# Altium PCB PCB_飞达电路V2.9_2021-11-06.pcbdoc
Units mm, origin at the board's own origin, x right, y up, seen from the top; angles counter-clockwise.
Board outline 196.74 x 120.55 mm, 2 copper layers (Top Layer, Bottom Layer); 54 components, 69 nets, 222 pads, 195 vias.
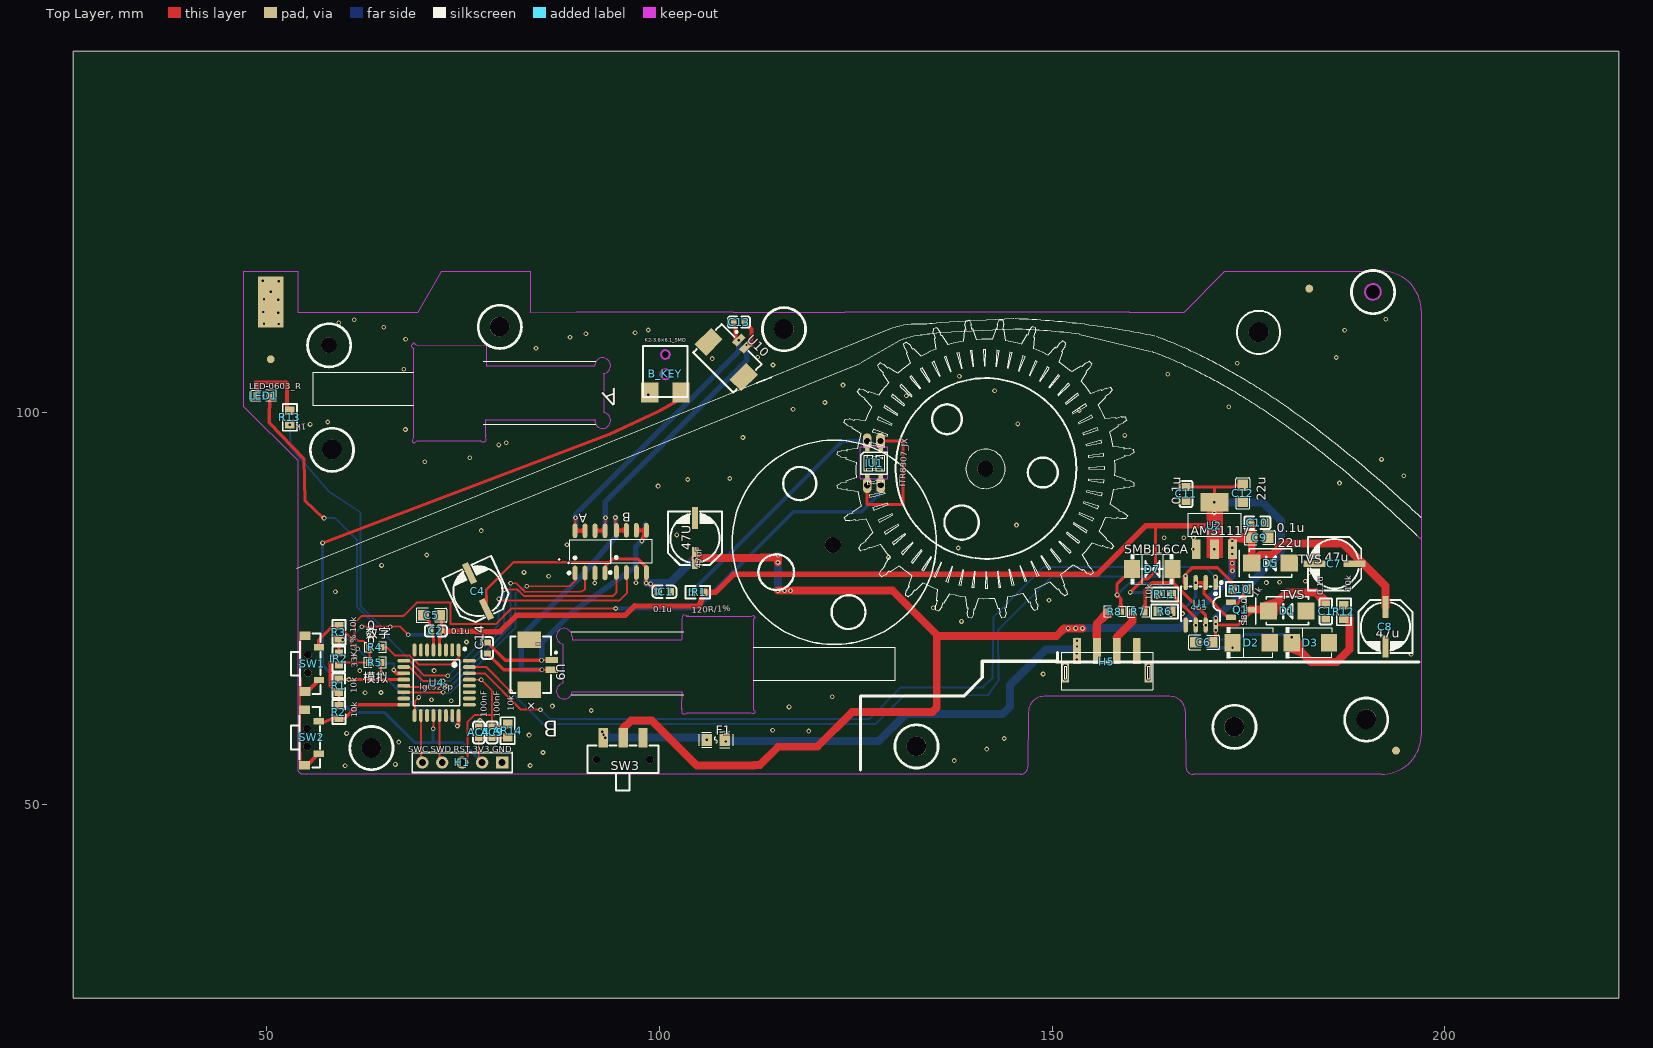
[diagram p0: Top Layer view]
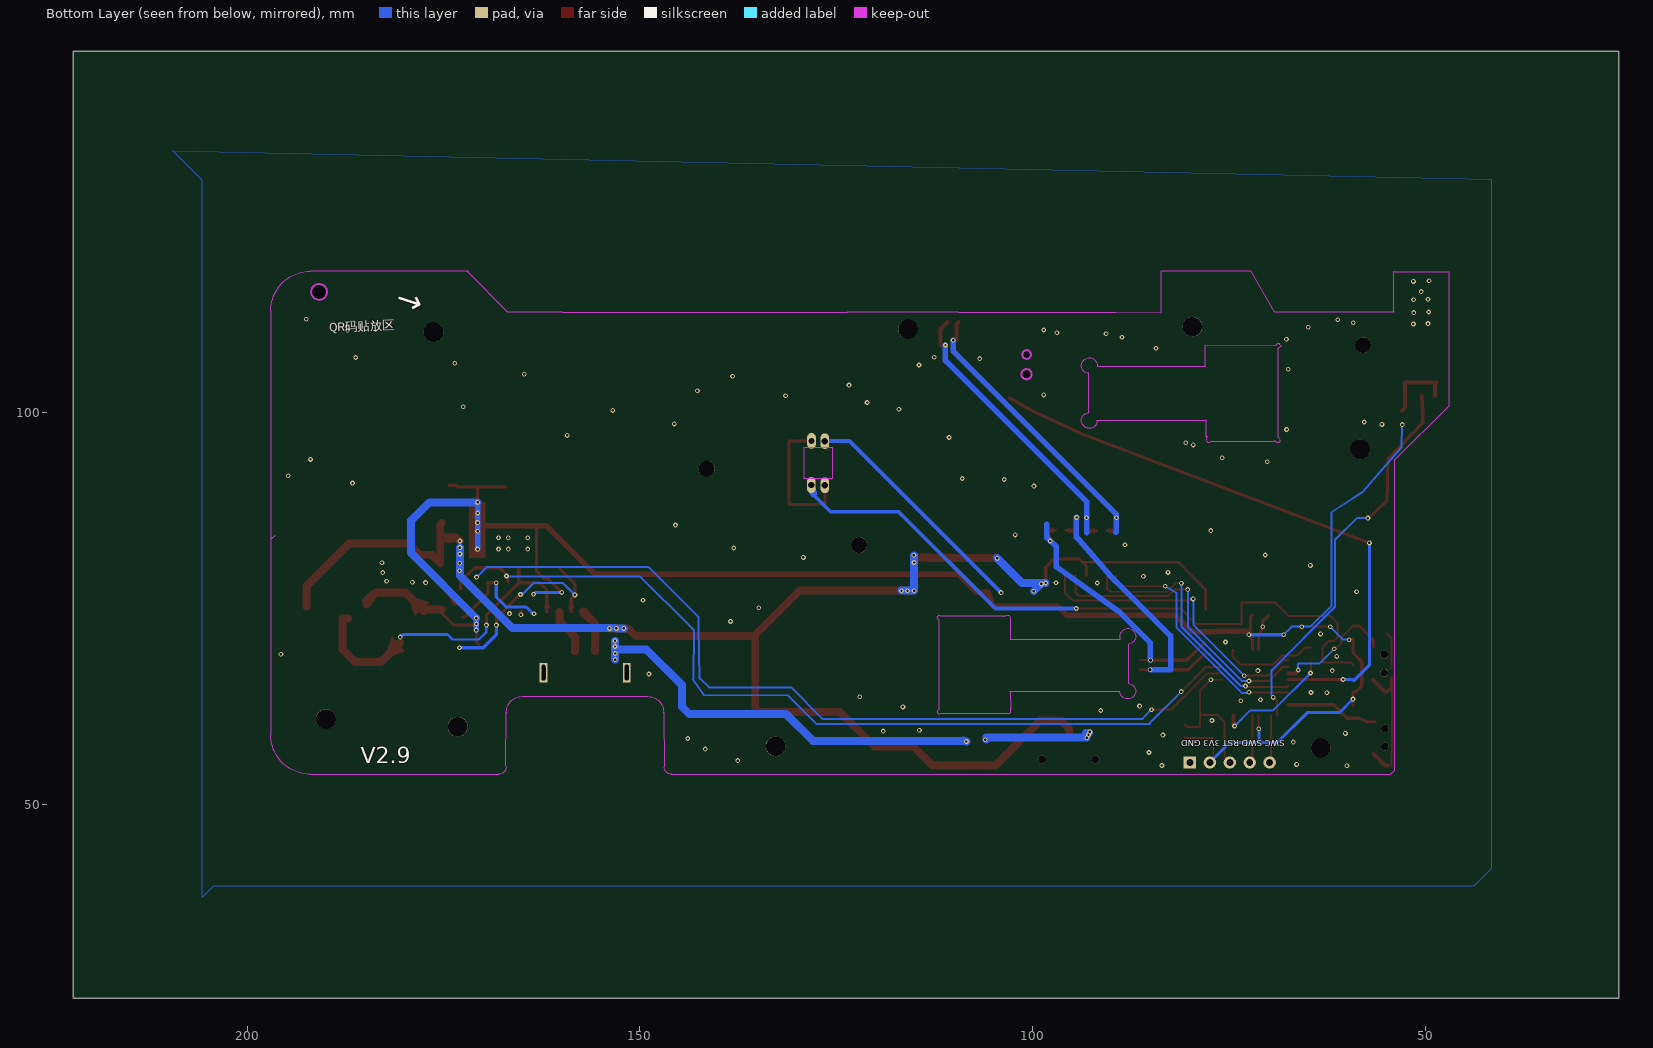
[diagram p1: Bottom Layer view, seen from below]

## Layer stack, top to bottom
Top Layer: signal copper (thickness not stored)
Dielectric: dielectric 0.32, FR-4, Dk 4.8
Bottom Layer: signal copper (thickness not stored)

## Board outline
222.142,25.4 25.4,25.4 25.4,145.948 222.142,145.948

## Components (designator, comment, footprint, x,y, rotation, side; value= is the part's Value field where it differs from the comment)
47U "47uF" CAP-D6.3-H5.5 104.547,86.511 r270 top
A "SOP-8_L4.9-W3.9-P1.27-LS6.0-BL" SOP-8_L4.9-W3.9-P1.27-LS6.0-BL 91.182,82.218 r0 top
AC4 "100nF" C0603#1 77.024,59.24 r90 top
AC9 "100nF" C0603#1 78.726,59.24 r270 top
AR14 "10k" R0603#1 80.697,59.457 r270 top
B "SOP-8_L4.9-W3.9-P1.27-LS6.0-BL" SOP-8_L4.9-W3.9-P1.27-LS6.0-BL 96.447,82.272 r0 top
B_KEY "K2-3.6×6.1_SMD" B_KEY 100.785,103.899 r0 top
C1 "0.1u" C0603#2 184.845,74.64 r270 top
C2 "0.1u" C0603#1 71.569,72.147 r0 top
C4 "47uF" CAP-D6.3-H5.5 75.846,79.518 r295 top
C5 "22u" C0805 71.013,74.145 r180 top
C6 "22u" C0805 169.316,70.689 r180 top
C7 "47u" CAP-D6.3-H5.5 183.387,80.706 r0 top
C8 "47u" CAP-D6.3-H5.5 192.432,70.149 r90 top
C9 "22u" C0805 176.448,84 r180 top
C10 "0.1u" C0603#2 176.124,85.917 r180 top
C11 "0.1u" C0603#2 167.052,89.589 r270 top
C12 "22u" C0805 174.288,89.67 r270 top
C13 "0.1u" C0603#1 110.163,111.459 r0 top
C14 "0.1u" C0603#1 78.114,69.987 r90 top
D1 "TVS" SMBJ5.0A 182.334,74.712 r180 top
D2 "SMBJ8.0A_C224028" SMB_L4.6-W3.6-LS5.3-RD 175.352,70.662 r0 top
D3 "SMBJ8.0A_C224028" SMB_L4.6-W3.6-LS5.3-RD 182.874,70.662 r0 top
D5 "TVS" SMBJ5.0A 180.201,80.787 r180 top
D7 "SMBJ16CA" SMB_L4.6-W3.6-LS5.3-BI 162.759,80.031 r180 top
F1 "F0805" F0805 107.193,58.269 r0 top
H1 "HDR-F-2.54_1x5" HDR-F-2.54_1X5 74.919,55.407 r180 top
H5 "HDR-F-2.54_1x4" 弹簧端子 156.972,67.059 r0 top
IC1 "0.1u" 0603_C_JX 100.659,77.142 r180 top
IR1 "120R/1%" 0603_R_JX 104.898,77.061 r0 top
IR2 "33K/1%" 0603_R_JX 59.232,68.582 r270 top
IU1 "ITR8307_JX" ITR8307_JX 127.339,93.51 r90 top
LED1 "LED-0603_R" LED0603_RED 49.629,102.09 r180 top
Q1 "S8550" SOT-23-3_L2.9-W1.6-P1.90-LS2.8-TR-CW 174.009,74.874 r180 top
R1 "10k" R0603#2 59.205,65.181 r270 top
R2 "10k" R0603#2 59.232,61.833 r90 top
R3 "10k" R0603#2 59.232,71.985 r270 top
R4 "0" R0603#3 63.876,70.068 r0 top
R5 "0" R0603#3 63.852,68.124 r0 top
R6 "4.7k" R0603#1 164.325,74.631 r180 top
R7 "20" R0603#3 160.979,74.577 r180 top
R8 "20" R0603#3 157.982,74.604 r180 top
R10 "1k" R0603#1 173.847,77.466 r0 top
R11 "10k" R0603#1 164.357,76.791 r0 top
R12 "10k" R0603#1 187.14,74.577 r90 top
R13 "1k" R0603#1 52.977,99.336 r270 top
SW1 "TSA365G00D-250" SW-SMD_TSA365G00D-250 55.803,67.986 r90 top
SW2 "TSA365G00D-250" SW-SMD_TSA365G00D-250 55.749,58.59 r90 top
SW3 "SSSS211603" SW-SMD_SSSS211603 95.394,58.539 r180 top
U1 "485" SOIC-8_L5.0-W4.0-P1.27-LS6.0-BL 168.906,75.603 r180 top
U2 "AMS1117" SOT-223-3_L6.5-W3.4-P2.30-LS7.0-BR 170.67,85.539 r270 top
U4 "lgt328p" LQFP-32_L7.0-W7.0-P0.80-LS9.0-BL 71.652,65.559 r180 top
U9 "CONN-SMD_WAFER-125W-2P" CONN-SMD_WAFER-125W-2P 84.891,67.827 r270 top
U10 "CONN-SMD_WAFER-125W-2P" CONN-SMD_WAFER-125W-2P 109.542,107.733 r315 top

## Footprints (in the part's own frame and the unit in brackets; to place one, negate y for a bottom-side part, rotate by r counter-clockwise, add the part's x,y. Pads: shape width x height; smd on the part's side, far side on the other; paste and mask are expansions set on the pad)
0603_C_JX [mm]
  rect 0.93x0.98 smd: 1(-0.77,-0.005) 2(0.772,0)
  silkscreen extent -1.55,-0.79 1.55,0.79
0603_R_JX [mm]
  rect 0.93x0.98 smd: 1(-0.77,-0.003) 2(0.772,-0.003)
  silkscreen extent -1.56,-0.8 1.57,0.8
B_KEY [mm]
  rect 2.2x2.5 smd: 1(-1.981,-1.397) 2(1.981,-1.397)
  round 1.3 hole 1.3 unplated: ""(0,0.889)
  round 1.1 hole 1.1 unplated: ""(0,3.429)
  silkscreen extent -2.87,-1.98 2.82,4.55
C0603#1 [mm]
  rect 0.8x0.9 smd: 1(-0.7,0) 2(0.7,0)
  silkscreen extent -1.41,-0.71 1.39,0.72
C0603#2 [mm]
  rect 1x1.1 smd: 1(-0.9,0) 2(0.9,0)
  silkscreen extent -1.65,-0.8 1.65,0.8
C0805 [mm]
  rect 1.41x1.35 smd: 1(-1.03,0) 2(1.03,0)
  silkscreen extent -1.96,-0.9 1.96,0.9
CAP-D6.3-H5.5 [mm]
  rect 2.8x0.8 smd: 1(5.08,0) 2(0,0)
  silkscreen extent -0.83,-3.43 5.97,3.43
CONN-SMD_WAFER-125W-2P [mm]
  rect 0.8x1.6 smd: 1(-0.625,1.45) 2(0.625,1.45)
  rect 2.1x3 smd: 3(3.175,-1.45) 4(-3.175,-1.45)
  silkscreen extent -3.6,-3.8 3.6,2.08
F0805 [mm]
  rect 1.335x1.5 smd: 1(-1.142,0) 2(1.142,0)
  silkscreen extent -2.16,-1.02 2.16,1.02
HDR-F-2.54_1X5 [mil]
  rect 62x62 hole 35: 1(-200,0)
  round 62 hole 35: 2(-100,0) 3(0,0) 4(100,0) 5(200,0)
  silkscreen extent -250,-50 250,50
ITR8307_JX [mm]
  rect 1.2x0.6 smd: 1(-2.1,0.85) 2(2.1,0.85) 3(-2.1,-0.85) 4(2.1,-0.85)
  silkscreen extent -1.4,-1.7 1.4,1.7
LED0603_RED [mm]
  rect 0.9x1 smd: 1(-0.85,0) 2(0.85,0)
  silkscreen extent -1.54,-0.73 1.75,0.73
LQFP-32_L7.0-W7.0-P0.80-LS9.0-BL [mm]
  oval 0.48x1.65 smd: 1(-2.799,-4.176) 2(-1.999,-4.176) 3(-1.199,-4.176) 4(-0.399,-4.176) 5(0.399,-4.176) 6(1.199,-4.176) 7(1.999,-4.176) 8(2.799,-4.176) 17(2.799,4.176) 18(1.999,4.176) 19(1.199,4.176) 20(0.399,4.176) 21(-0.399,4.176) 22(-1.199,4.176) 23(-1.999,4.176) 24(-2.799,4.176)
  oval 1.65x0.48 smd: 9(4.176,-2.799) 10(4.176,-1.999) 11(4.176,-1.199) 12(4.176,-0.399) 13(4.176,0.399) 14(4.176,1.199) 15(4.176,1.999) 16(4.176,2.799) 25(-4.176,2.799) 26(-4.176,1.999) 27(-4.176,1.199) 28(-4.176,0.399) 29(-4.176,-0.399) 30(-4.176,-1.199) 31(-4.176,-1.999) 32(-4.176,-2.799)
  silkscreen extent -3.75,-4.45 2.95,2.95
R0603#1 [mm]
  rect 1.1x1.199 smd: 1(-0.85,0) 2(0.85,0)
  silkscreen extent -1.7,-0.9 1.7,0.9
R0603#2 [mm]
  rect 1x1.1 smd: 1(-0.8,0) 2(0.8,0)
  silkscreen extent -1.55,-0.8 1.55,0.81
R0603#3 [mm]
  rect 0.806x0.864 smd: 1(-0.753,0) 2(0.753,0)
  silkscreen extent -1.39,-0.66 1.39,0.66
SMB_L4.6-W3.6-LS5.3-BI [mm]
  rect 2.047x2.241 smd: 1(-2.591,0) 2(2.591,0)
  silkscreen extent -2.67,-1.91 2.74,1.91
SMB_L4.6-W3.6-LS5.3-RD [mm]
  rect 2.047x2.192 smd: 1(-2.361,0) 2(2.361,0)
  silkscreen extent -3.12,-1.96 2.74,1.96
SMBJ5.0A [mm]
  rect 2.2x2.15 smd: 1(0,0) 2(4.79,0)
  silkscreen extent -0.31,-1.8 6.4,1.8
SOIC-8_L5.0-W4.0-P1.27-LS6.0-BL [mil]
  oval 22.38x76.78 smd: 1(-75,-106.5) 2(-25,-106.5) 3(25,-106.5) 4(75,-106.5) 5(75,106.5) 6(25,106.5) 7(-25,106.5) 8(-75,106.5)
  silkscreen extent -110,-112 98,87
SOP-8_L4.9-W3.9-P1.27-LS6.0-BL [mm]
  oval 0.63x1.865 smd: 1(-1.905,-2.682) 2(-0.635,-2.682) 3(0.635,-2.682) 4(1.905,-2.682) 5(1.905,2.682) 6(0.635,2.682) 7(-0.635,2.682) 8(-1.905,2.682)
  silkscreen extent -2.82,-2.83 2.58,1.52
SOT-23-3_L2.9-W1.6-P1.90-LS2.8-TR-CW [mm]
  rect 1.25x0.7 smd: 1(1.25,0.95) 2(1.25,-0.95) 3(-1.25,0)
  silkscreen extent -0.65,-1.46 0.9,1.46
SOT-223-3_L6.5-W3.4-P2.30-LS7.0-BR [mm]
  rect 2.5x1.1 smd: 1(2.97,-2.3) 2(2.97,0) 3(2.97,2.3)
  rect 2.34x3.6 smd: 4(-2.97,0)
  silkscreen extent -1.57,-3.33 1.37,3.33
SW-SMD_SSSS211603 [mm]
  rect 1.2x2.5 smd: 1(-2.54,0) 2(0,0) 3(2.54,0)
  round 1 hole 1 unplated: ""(-3.401,2.75) ""(3.401,2.75)
  silkscreen extent -4.5,1 4.5,6.67
SW-SMD_TSA365G00D-250 [mm]
  rect 0.8x1.3 smd: 1(-2.075,-0.9) 2(2.075,-0.9)
  rect 1.1x1.35 smd: 3(-3.55,0.9) 4(3.55,0.9)
  round 1 hole 1 unplated: ""(-1.15,0.55) ""(1.15,0.55)
  silkscreen extent -3.85,-1.05 3.85,2.65
弹簧端子 [mm]
  rect 1x3.3 smd: 1(-3.81,2.515) 2(-1.27,2.515) 3(1.27,2.515) 4(3.81,2.515)
  rect 1x2.5 hole 0.5 slot 2 at 90 deg: 5(5.298,-0.216) 6(-5.291,-0.208)
  silkscreen extent -5.83,-2.41 5.83,2.41

## Free pads (board coordinates)
  round 1 smd: 1(50.547,106.734) 2(193.773,56.919) 3(182.73,115.725)
  rect 3.2x6.5 smd: 4(50.547,113.997)
  round 2 hole 2 unplated: ""(57.958,108.528) ""(190.836,115.307) ""(190.841,115.27) ""(190.863,115.307) ""(190.863,115.307)
  round 2.5 hole 2.5 unplated: ""(58.319,95.222) ""(58.341,95.259) ""(58.341,95.259) ""(63.341,57.259) ""(79.68,110.872) ""(115.859,110.576) ""(132.723,57.471) ""(173.189,59.959) ""(176.267,110.172) ""(176.289,110.208) ""(176.289,110.208) ""(189.969,60.881) ""(189.991,60.917) ""(189.991,60.917)
  round 1.3 hole 1.3 unplated: ""(100.788,104.838) ""(100.793,104.802) ""(100.815,104.839) ""(100.815,104.839)
  round 1.1 hole 1.1 unplated: ""(100.788,107.339) ""(100.793,107.302) ""(100.815,107.339) ""(100.815,107.339)
  round 2.05 hole 2.05 unplated: ""(122.091,83.089) ""(141.507,92.796)
  oval 1.1x2 hole 0.8: ""(126.462,90.696) ""(126.462,96.312) ""(128.163,96.339) ""(128.19,90.723)

## Via types
v1: diameter 0.61, hole 0.305, Top Layer to Bottom Layer, 193 vias
v2: diameter 0.61, hole 0.4, Top Layer to Bottom Layer, 2 vias

## Nets (pads, with @x,y where several pads share a name; then routed paths per layer and width w, separated by ;. In a path a pad name is that pad's centre, name@x,y a point inside that pad or via, vN(x,y) a via of type N, cw(c..) or ccw(c..) an arc to the next point about the centre after c; other vN are vias at no path point)
13: LED1.1 U4.17 | length 49.9
  Top Layer w0.254: U4.17 68.899,61.429 68.899,63.21 v1(69.384,63.696) v1@69.331,63.695
  Top Layer w0.4: LED1.1 50.357,100.012 50.357,98.633 54.797,94.02 54.906,88.701 v1@57.322,86.42
  Bottom Layer w0.254: v1(57.338,86.511) 58.747,86.511 61.528,83.73 61.528,75.224 69.6,67.152 69.6,63.911 v1(69.384,63.696)
485A: H5.2 R8.2 | length 5.7
  Top Layer w1: H5.2@155.703,69.573 155.703,73.078 R8.2@157.23,74.604
485B: H5.3 R7.2 | length 5.8
  Top Layer w1: H5.3@158.243,69.573 158.243,71.384 160.227,73.367 R7.2@160.227,74.576
+3.3V: AC4.1 AC9.2 AR14.2 C1.1 C2.2 C5.1 C6.1 C11.1 C12.1 D1.2 H1.2 IR1.2 IR2.1 Q1.3 R1.2 R2.2 R3.2 R11.1 R13.2 U1.8 U2.2 U2.4 U4.4 U4.20 | length 280.4
  Top Layer w0.254: v1(62.121,72.687) 67.034,72.687 v1(68.06,71.661) ; v1@71.22,59.7 71.253,59.733 U4.20 ; H1.2 77.024,55.841 77.024,58.541 80.631,58.541 AR14.2
  Top Layer w0.4: R2.2 v1(59.232,63.481) 59.232,64.353 59.206,64.381 58.899,64.381 58.124,65.153 58.124,68.249 59.229,69.354 R3.2 ; C5.1@72.043,74.145 72.269,73.918 C2.2@72.269,72.148 ; U4.4 72.051,71.041 72.051,71.224 v1(72.489,71.661) ; v1(159.951,77.061) 161.652,78.762 162.165,78.762 163.168,79.765 163.168,85.511 ; C11.1@167.052,90.489 173.181,90.489 173.392,90.7 C12.1@174.289,90.7 ; C6.1@170.491,70.446 170.811,70.766 U1.8 173.674,72.897 175.259,74.482 Q1.3@175.259,74.874 ; 170.598,90.489 170.669,90.418 v1(170.669,88.508)
  Top Layer w0.7: C2.2@72.444,72.12 76.537,72.12 ; 76.684,72.067 79.734,72.067 81.812,74.145 95.663,74.145 96.905,75.387 105.086,75.28 105.67,77.058 107.136,77.058 109.435,79.357 155.739,79.357 161.896,85.511 170.669,85.514 v1(170.669,85.938) v1(170.669,88.508) ; v1(170.669,82.57) v1@170.669,85.935
  Top Layer w1: Q1.3@175.262,74.874 177.382,74.874 D1.2 ; D1.2@177.545,74.711 179.892,77.06 183.656,77.06 184.845,75.872 C1.1
  Bottom Layer w0.254: v1@52.978,98.417 53.057,95.529 57.945,89.913 61.967,87.248 61.967,75.369 64.66,72.687 v1@65.752,72.687 ; v1(59.718,71.04) 60.474,71.04 v1(62.121,72.687) ; v1(65.754,72.687) 67.034,72.687 v1@68.061,71.66
  Bottom Layer w0.4: v1(59.232,63.481) 60.961,61.752 65.063,61.752 68.871,57.944 74.922,57.944 H1.2 ; v1(68.06,71.661) v1(72.489,71.661) ; 71.189,57.944 71.22,57.976 v1(71.22,59.7) ; v1(159.951,77.061) 163.299,77.061 v1(163.542,76.818)
  Bottom Layer w0.7: v1(170.669,82.57) v1(170.669,88.508) ; v1(170.832,72.255) v1(170.832,73.038) v1(170.832,73.782)
  Bottom Layer w1: v1(170.669,88.508) 176.826,88.508 179.12,86.215 179.12,82.072 v1(170.832,73.782)
  other v1: 170.669,84.837 170.643,87.159 170.669,88.508 52.977,98.418
A1: A.7 A.8 C13.1 U10.1 | length 38.5
  Top Layer w0.3: A.8@89.277,84.901 A.7@90.547,84.901 ; A.8@89.346,85.219 v1(89.346,86.565)
  Top Layer w0.5: C13.1@109.463,111.46 109.732,111.19 109.732,109.164 v1(110.136,109.164)
  Bottom Layer w0.7: 89.418,84.702 89.346,84.774 v1(89.346,86.565) 89.346,86.997 110.136,107.787 v1(110.136,109.164)
A2: A.5 A.6 C13.2 U10.2 | length 37.9
  Top Layer w0.3: A.6@91.817,84.901 A.5@93.087,84.901 ; v1@93.153,86.565 A.5@93.156,85.219
  Top Layer w0.5: C13.2@110.862,111.46 111.728,110.594 111.728,108.544 U10.2@111.109,108.544
  Bottom Layer w0.7: 93.117,84.648 93.153,84.683 v1(93.153,86.565) 93.153,88.617 111.108,106.572 v1(111.108,108.543)
B1: B.7 B.8 C14.1 U9.2 | length 39.4
  Top Layer w0.3: v2@85.053,67.205 U9.2@86.341,67.203 ; v1@94.421,86.593 B.8@94.426,85.219 ; B.8@94.543,84.955 B.7@95.813,84.955
  Top Layer w0.4: C14.1 80.195,67.206 v2(85.053,67.206)
  Bottom Layer w0.7: v2(85.053,67.206) 82.409,67.206 82.409,71.295 82.46,71.345 82.46,71.508 90.123,79.123 ; 89.552,78.549 94.091,83.731 94.44,84.081 94.44,84.648 94.44,86.592 v1(94.422,86.592)
B2: B.5 B.6 C14.2 U9.1 | length 36.5
  Top Layer w0.3: v2(85.026,68.421) 85.057,68.452 U9.1 ; B.6@97.083,84.955 B.5@98.353,84.955 ; B.5@98.237,84.457 B.5@98.237,85.218
  Top Layer w0.4: C14.2 80.38,68.421 v2(85.026,68.421)
  Top Layer w0.5: v1@97.817,83.591 B.5@98.283,85.215
  Bottom Layer w0.7: v2(85.026,68.421) 85.026,70.635 88.887,74.496 96.991,80.301 96.991,82.867 97.719,83.595 v1(97.77,83.595) 98.22,84.045 98.22,85.755
GND: 47U.2 A.3 AC4.2 B.3 B_KEY.1 C1.2 C2.1 C4.2 C5.2 C6.2 C7.2 C8.2 C9.1 C10.1 C11.2 C12.2 D1.1 D2.2 D3.2 D5.1 H1.1 H5.4 IC1.1 IU1.1 IU1.4 pad.2 pad.3 pad.@126.462,90.696 pad.@128.163,96.339 R6.1 R12.2 SW1.1 SW1.3 SW1.4 SW2.1 SW2.3 SW2.4 U1.5 U2.1 U4.5 | length 45.5
  Top Layer w0.254: 54.291,66.337 54.291,58.597 SW2.3@54.327,54.948 ; 54.319,67.436 54.319,71.221 SW1.4@54.903,71.805
  Top Layer w0.4: 54.355,66.154 54.355,64.912 SW1.3@54.84,64.424 ; C5.2@69.983,74.145 70.735,73.393 v1(70.735,72.687) ; C2.1@70.87,72.148 71.253,71.762 U4.5 ; pad.@126.463,90.695 126.463,88.239 131.035,88.239 131.035,96.339 pad.@128.162,96.339 ; R6.1@164.99,74.335 165.174,74.52 R6.1
  Top Layer w0.5: SW2.3 55.174,55.04 SW2.1 ; SW1.3@54.903,64.436 55.228,64.436 SW1.1
  other v1: 60.011,55.002 83.559,55.029 66.41,55.164 137.559,55.65 85.206,56.676 141.69,57.108 66.842,57.999 143.904,58.458 83.433,58.89 60.2,59.106 119.019,59.403 114.429,59.511 77.196,60.753 91.344,62.022 116.526,62.481 86.403,62.589 73.524,63.264 71.013,63.399 122.016,63.777 62.553,64.29 64.578,64.317 148.854,66.666 61.878,67.098 71.337,67.098 61.311,68.907 195.699,69.177 75.468,70.743 63.363,71.769 138.477,73.362 165.149,74.199 166.607,74.361 134.886,75.09 149.61,76.062 58.773,77.142 91.803,78.249 97.041,78.276 177.285,78.303 178.959,78.357 182.253,78.465 85.917,79.113 182.739,79.572 82.785,79.599 64.659,80.49 182.847,80.841 129.189,81.516 70.41,81.813 164.271,82.569 166.755,82.569 167.997,82.569 138.072,82.704 88.253,83.109 164.271,84 166.755,84 167.997,84 102.225,84.378 77.349,84.918 145.47,85.62 99.849,90.588 186.591,90.966 103.629,91.425 108.975,91.56 194.772,91.911 70.14,93.693 191.937,93.99 75.891,94.206 79.563,95.826 80.535,96.096 110.649,96.771 159.24,97.041 67.683,97.797 55.56,98.445 145.632,98.499 57.801,98.742 153.462,100.227 117.039,100.362 172.497,100.686 121.089,101.226 131.457,102.09 98.607,102.198 142.689,102.711 123.384,103.44 138.207,104.574 164.721,104.817 67.467,105.465 114.483,106.005 173.577,106.221 106.734,106.815 186.186,106.95 112.539,106.977 84.315,108.138 67.71,109.272 88.635,109.542 90.66,109.974 96.924,110.109 187.239,110.433 98.598,110.46 64.929,110.811 59.205,111.378 61.176,111.756 192.477,111.837
H5_1: F1.2 H5.1 | length 54.2
  Top Layer w1: v1(108.435,58.08) v1(108.462,58.08)
  Bottom Layer w1: 108.867,58.215 v1(108.435,58.08) 108.757,58.16 127.982,58.16 131.411,61.589 143.722,61.589 144.642,62.509 144.642,65.262 149.178,69.799 152.795,69.799 v1@153.174,70.177 ; v1(153.147,68.502) 153.174,68.529 v1(153.174,70.905)
  other v1: 153.147,69.285 153.174,70.176
H5_2: F1.1 SW3.3 | length 13.5
  Bottom Layer w1: v1@92.829,59.187 92.856,59.16 93.261,59.16 ; v1@93.125,58.567 105.924,58.567 v1@105.924,58.351
  other v1: 106.059,58.296 93.126,58.566 92.91,58.917 92.721,59.295
INA1: A.1 U4.14 | length 31.1
  Top Layer w0.254: U4.14 67.548,64.289 72.49,64.289 v1@72.49,64.345 ; v1@83.128,77.845 83.153,77.817 88.617,77.844 89.374,78.59 A.1@89.374,79.217
  Bottom Layer w0.254: v1@72.49,64.345 72.597,64.236 73.326,64.236 81.723,72.633 81.705,76.98 v1(83.127,77.844)
  other v1: 72.489,64.344
INA2: A.2 U4.13 | length 34.3
  Top Layer w0.254: U4.13@67.466,65.153 67.581,65.039 72.922,65.039 v1@72.922,65.128 ; v1@81.076,78.221 81.805,78.221 82.912,77.114 90.048,77.142 90.535,77.429 A.2@90.535,79.217
  Bottom Layer w0.254: v1@72.922,65.128 73.489,65.128 81.076,72.717 81.076,78.221 v1@80.913,78.221
  other v1: 72.921,65.127 81.075,78.222
INB1: B.1 U4.10 | length 38.1
  Top Layer w0.254: U4.10 68.195,67.558 69.978,65.775 v1(72.49,65.775) ; v1(80.265,77.412) 81.967,77.411 82.803,76.575 94.088,76.575 94.53,77.017 B.1@94.53,79.217
  Bottom Layer w0.254: v1(72.49,65.775) 73.353,65.775 80.265,72.687 v1(80.265,77.412)
INB2: B.2 U4.9 | length 38
  Top Layer w0.254: U4.9 68.205,68.358 70.113,66.451 v1(73.082,66.451) ; v1@79.59,76.225 79.806,76.009 94.926,76.009 95.907,76.989 B.2@95.907,79.217
  Bottom Layer w0.254: v1(73.082,66.451) 79.509,72.878 79.509,76.224 v1(79.59,76.224)
IU1_2: IR1.1 IU1.2 pad.@126.462,96.312 | length 30.4
  Bottom Layer w0.5: v1(104.034,77.034) 123.311,96.311 pad.@126.463,96.311
IU1_3: IR2.2 IU1.3 pad.@128.19,90.723 R4.1 R5.1 | length 89
  Top Layer w0.254: IR2.2@59.229,67.81 59.541,68.125 63.097,68.125 R4.1 62.313,70.878 61.662,70.878 61.203,71.338 61.203,73.146 62.122,74.063 67.466,74.063 67.466,74.109 69.122,75.765 73.443,75.765 73.443,73.012 79.168,73.012 81.165,75.008 v1(94.467,75.009)
  Bottom Layer w0.5: v1@94.385,75.008 104.761,75.008 117.075,87.322 125.734,87.322 128.19,89.778 pad.@128.19,90.723
KEY1: R3.1 SW1.2 U4.11 | length 15.8
  Top Layer w0.254: R3.1 60.69,71.328 60.69,70.634 61.446,69.88 v1@61.634,69.88
  Top Layer w0.4: SW1.2@56.648,70.121 56.654,70.997 58.467,72.791 R3.1
  Top Layer w0.5: v1(66.207,67.179) 66.628,66.758 U4.11
  Bottom Layer w0.254: v1@61.634,69.88 63.524,67.99 66.206,67.99 v1@66.206,67.18
  other v1: 61.635,69.879
KEY2: R2.1 SW2.2 U4.16 | length 11.8
  Top Layer w0.4: SW2.2@56.514,60.618 57.405,60.564 58.411,61.033 R2.1 59.971,61.033 61.698,62.76 U4.16
KEY3: B_KEY.2 R1.1 U4.12 | length 77.5
  Top Layer w0.4: v1@57.159,83.345 80.677,92.255 93.599,97.176 99.876,100.083 100.207,100.266 B_KEY.2@102.968,101.793 ; R1.1@59.206,65.981 U4.12
  Bottom Layer w0.4: v1(57.149,83.352) 57.149,67.778 59.124,65.802 59.286,65.964 v1(60.501,65.964)
KEY_A: R5.2 U4.24 | length 15.2
  Top Layer w0.254: R5.2@64.606,68.125 64.606,66.836 v1(64.641,66.801)
  Top Layer w0.5: v1(74.307,60.051) 74.451,60.195 U4.24
  Bottom Layer w0.254: v1(64.641,66.801) 69.393,62.049 72.309,62.049 v1(74.307,60.051)
KEY_D: R4.2 U4.1 | length 12.1
  Top Layer w0.254: R4.2 65.335,70.068 66.387,69.016 68.251,69.016 69.387,67.881 73.542,67.881 74.553,68.892 74.553,69.634 U4.1
LED1_1: LED1.2 R13.1 | length 9.4
  Top Layer w0.5: LED1.2 48.779,103.615 48.63,103.764 52.572,103.764 52.599,103.737 52.599,100.563 R13.1
Q1_2: Q1.2 R10.2 | length 2.4
  Top Layer w0.4: Q1.2@173.333,75.603 173.628,75.603 R10.2@174.697,77.467
RESET: AC9.1 AR14.1 H1.3 U4.29 | length 19.1
  Top Layer w0.254: H1.3 75.567,56.055 75.567,60.51 76.528,61.47 78.726,61.47 ; U4.29 77.321,65.938 78.726,64.533 78.726,59.941 80.331,59.941 AR14.1
  other v1: 77.322,65.937
RX: U1.1 U4.30 | length 110.3
  Top Layer w0.254: U4.30 77.771,66.758 82.4,62.13 v1(84.891,62.13)
  Bottom Layer w0.254: v1(84.891,62.13) 86.051,60.97 126.768,60.97 130.763,64.965 141.185,64.965 142.401,66.126 142.528,72.74 142.528,73.898 148.898,80.268 169.533,80.268 v1(170.796,79.005)
S$35: 
S$43: 
S$1051: 
S$38340: 
S$48411: 
S$48762: 
S$48764: 
S$51557: 
S$51587: 
S$51593: 
S$51600: 
S$51607: 
S$51613: 
S$51621: 
S$51627: 
S$51629: 
S$51631: 
S$51633: 
S$51638: 
S$53058: 
S$53060: 
S$56840: 
S$56853: 
S$56864: 
S$56875: 
S$56888: 
S$56985: 
S$56996: 
S$57029: 
S$58054: 
S$58064: 
S$58274: 
S$58276: 
S$58331: 
S$66302: 
S$66304: 
SWC: H1.5 U4.18 | length 6.1
  Top Layer w0.254: U4.18 69.653,55.592 H1.5
SWD: H1.4 U4.21 | length 6.1
  Top Layer w0.254: U4.21 72.051,55.735 H1.4
TX: R10.1 U1.4 U4.31 | length 114.9
  Top Layer w0.254: U4.31 77.978,67.558 v1(81.111,64.425)
  Top Layer w0.4: U1.4@166.8,79.14 166.8,78.319 U1.4@166.812,78.308 ; U1.4@166.801,79.141 167.852,80.192 171.065,80.192 172.808,78.45 R10.1@172.808,77.467
  Bottom Layer w0.254: v1(81.111,64.425) 85.079,60.457 85.079,60.322 127.55,60.322 131.141,63.913 141.888,64.02 143.265,66.019 ; 143.184,66.072 143.115,72.222 143.742,72.849 ; 143.742,72.849 150.004,79.111 166.96,79.111 v1(166.989,79.14)
U1_2: Q1.1 R6.2 U1.2 U1.3 | length 14.4
  Top Layer w0.4: U1.3@168.284,78.277 169.32,78.277 169.351,78.308 169.351,76.885 172.312,73.924 Q1.1@172.569,73.924
  Bottom Layer w0.4: v1(163.481,74.334) 163.614,74.335 164.477,75.199 167.017,75.199 168.285,76.467 v1(168.285,78.276)
U1_6: D2.1 D7.2 R8.1 R11.2 U1.6 | length 26.4
  Top Layer w0.4: R8.1@158.736,74.604 158.736,76.278 158.276,76.738 158.276,78.14 D7.2@160.169,80.03 ; v1(165.208,76.791) 165.284,76.791 165.816,76.26 168.271,73.804 v1(168.271,72.897)
  Bottom Layer w0.3: v1@158.276,76.738 158.627,77.088 158.655,77.088 159.816,78.249 163.514,78.249 164.972,76.791 v1(165.208,76.791)
  Bottom Layer w0.4: v1(168.271,72.897) 168.271,71.683 169.94,70.015 v1@172.965,70.015
  other v1: 172.965,70.014 158.277,76.737
U1_7: D3.1 D7.1 R7.1 R12.1 U1.7 | length 41.9
  Top Layer w0.4: R7.1@161.868,74.576 161.868,77.411 162.732,78.277 165.432,78.277 ; D7.1@165.35,80.03 165.432,79.948 165.432,78.277 ; v1(169.541,72.897) 169.541,74.167 165.432,78.277
  Top Layer w1: D3.1@180.514,70.662 182.97,68.206 186.249,68.206 187.842,69.799 187.842,73.728 R12.1@187.141,73.728
  Bottom Layer w0.3: v1(169.541,72.897) 169.541,72.033 170.508,71.067 173.856,71.067 174.043,71.254 ; 174.042,71.254 174.476,71.688
  Bottom Layer w0.4: 174.477,71.688 180.174,71.688 v1(180.498,71.364)
V-IN: 47U.1 A.4 B.4 C4.1 C7.1 C8.1 C9.2 C10.2 D5.2 IC1.2 SW3.2 U2.3 | length 217.1
  Top Layer w0.3: C4.1 77.993,77.426 81.462,80.895 93.449,80.895
  Top Layer w0.4: A.4@93.156,79.217 93.156,80.411 94.045,81.3 97.309,81.3 98.337,80.272 v1(98.337,78.249) 98.446,78.14 v1(98.904,78.141) 98.931,78.141 v1(99.876,77.196) 99.887,77.184 IC1.2
  Top Layer w0.7: v1(172.938,80.76) 172.965,80.733 v1(172.965,79.815) ; 172.965,80.197 U2.3@172.97,82.57
  Top Layer w1: SW3.2 95.394,59.728 96.42,60.754 99.064,60.754 104.789,55.029 112.079,55.029 112.729,55.082 ; v1(104.52,81.381) 47U.1 113.025,81.431 113.025,81.516 ; 112.079,55.082 112.808,55.082 115.132,57.406 120.126,57.406 124.553,61.833 134.761,61.833 135.327,62.4 135.327,71.66 ; 113.024,81.516 115.023,81.516 115.104,81.434 v1(115.104,80.868) ; v1@115.104,77.277 v1(115.949,77.277) v1(116.711,77.277) ; v1@116.712,77.276 129.712,77.276 135.327,71.66 ; v1(153.875,72.471) v1(152.991,72.471) v1(152.051,72.471) 151.528,72.471 150.583,71.526 135.462,71.526 135.327,71.66 ; U2.3@172.912,83.596 173.316,84 C9.2@175.419,84 ; C10.2 175.419,85.722 C9.2@175.419,84 ; C8.1 192.432,77.871 187.032,83.271 182.091,83.271 179.445,83.271 178.015,81.841 176.463,81.841 175.411,80.787 175.411,82.641 175.421,82.651 C9.2@175.419,84
  Bottom Layer w1: v1@99.877,77.195 98.823,78.249 v1(98.337,78.249) 101.365,78.249 v1@104.547,81.431 ; v1(115.131,81.786) 115.131,80.895 v1(115.104,80.868) v1(115.104,77.277) v1(116.711,77.277) ; v1(152.051,72.471) v1(152.991,72.471) ; v1@153.163,72.524 166.255,72.524 172.912,79.181 v1@172.912,82.758
  other v1: 172.911,81.948 172.911,82.758 172.911,83.595
pads on no net: B_KEY. H5.5 H5.6 SW1. SW2. SW3. SW3.1 U4.2 U4.3 U4.6 U4.7 U4.8 U4.15 U4.19 U4.22 U4.23 U4.25 U4.26 U4.27 U4.28 U4.32 U9.3 U9.4 U10.3 U10.4
copper on no net:
  other v1: 51.546,111.216 49.683,111.27 51.492,112.674 49.602,112.755 51.519,114.321 49.683,114.375 50.547,115.347 51.546,116.643 49.548,116.724

## Polygon pours and split planes (outlines as drawn)
GND on Bottom Layer (solid): 41.61,129.657 41.61,41.907 43.878,39.639 204.285,39.639 205.689,38.235 205.689,129.495 209.442,133.248
GND on Top Layer (solid): 41.151,128.793 41.151,41.151 38.1,38.1 203.961,38.1 208.281,42.42 208.281,128.523 209.037,129.279

## Keep-outs
Keep-Out Layer:
  circle w0.254: c190.839,115.304 r1
  circle w0.254: c100.792,104.836 r0.65
  circle w0.254: c100.792,107.336 r0.55
  lines w0.08: 87.798,70.473 cw(c87.898,71.468) 88.897,71.425 ; 87.802,65.486 ccw(c87.902,64.491) 88.898,64.398 ; 91.801,105.901 cw(c92.801,105.92) 92.901,104.925 ; 91.806,98.986 ccw(c92.805,98.943) 92.905,99.938 ; 191.991,53.917 ccw(c191.991,58.917) 196.991,58.917 ; 191.991,117.917 cw(c191.991,112.917) 196.991,112.917
  lines w0.1: 146.991,61.817 cw(c148.991,61.817) 148.991,63.817 ; 164.991,63.817 cw(c164.991,61.817) 166.991,61.833
  lines w0.1 net S$58054: 145.965,53.922 ccw(c146.019,54.82) 146.919,54.82
  lines w0.1 net S$58064: 167.052,54.948 ccw(c167.942,54.818) 168.048,53.925

## Other copper
Top Layer:
  region net V-IN: 77.834,76.2 78.151,75.521 78.143,76.604 77.843,77.247
  region net B2: 97.397,85.329 97.397,84.579 97.847,84.804 97.847,85.104
  region net B2: 98.037,84.579 98.037,85.329 97.587,85.104 97.587,84.804
  region net B1: 94.857,85.329 94.857,84.579 95.307,84.804 95.307,85.104
  region net B1: 95.497,84.579 95.497,85.329 95.047,85.104 95.047,84.804
  region net A2: 92.132,85.275 92.132,84.525 92.582,84.75 92.582,85.05
  region net A2: 92.772,84.525 92.772,85.275 92.322,85.05 92.322,84.75
  region net A1: 90.232,84.525 90.232,85.275 89.782,85.05 89.782,84.75
  region net A1: 89.592,85.275 89.592,84.525 90.042,84.75 90.042,85.05
  region net 485A: 157.631,74.173 156.826,75.036 155.827,73.908 156.509,73.177
  region net 485A: 155.202,71.224 156.202,71.224 156.202,72.724 155.202,72.724
  region net 485B: 157.742,71.224 158.742,71.224 158.742,71.383 157.742,71.383
  region net U1_6: 159.14,75.037 158.332,75.037 158.536,75.637 158.936,75.637
  region net U1_6: 158.581,76.756 158.258,76.433 158.429,76.302 158.712,76.585
  region net U1_7: 162.136,75.009 161.368,75.009 161.668,75.609 162.068,75.609
  region net U1_7: 169.313,73.099 169.77,73.099 169.741,73.312 169.341,73.312
  region net V-IN: 174.713,83.325 174.713,84.676 173.316,84.5 173.316,83.5
  pour cut-out: 112.763,110.622 cw(c115.905,110.631) 119.047,110.622 cw(c115.905,110.613) 112.763,110.622
  region net +3.3V: 184.295,75.328 185.395,76.038 184.305,77.12 183.446,76.565
  region net +3.3V: 176.815,75.787 178.644,74.083 179.176,75.637 178.444,76.319
  region net U1_7: 181.536,71.507 179.961,69.566 181.449,69.019 182.082,69.8
  region net U1_7: 187.74,74.278 187.74,73.178 187.842,73.227 187.842,74.227
  pour cut-out: 146.586,64.614 167.187,64.614 167.187,62.346 146.586,62.346
  pour cut-out: 53.976,79.963 54.138,77.641 96.069,94.219 119.127,103.264 125.796,106.18 132.384,108.556 146.262,109.569 156.36,108.489 163.11,106.95 170.805,104.047 180.903,97.621 196.995,83.986 197.076,85.228 197.13,86.47 189.138,93.328 181.335,99.376 175.503,103.399 169.563,106.666 163.488,109.42 155.388,110.851 146.208,111.742 131.007,110.824 130.035,110.608
  pour cut-out: 111.972,70.176 130.089,70.176 130.089,65.829 111.972,65.829
  pour cut-out: 55.812,104.385 68.907,104.385 68.907,100.254 55.812,100.254
  pour cut-out: 77.547,106.977 92.127,106.977 92.127,97.743 77.547,97.743
  pour cut-out: 88.036,72.606 103.021,72.606 103.035,62.616 88.05,62.616
  rectangle net +3.3V: 169.644,81.408 171.75,88.563
Bottom Layer:
  region net U1_6: 158.581,76.718 158.258,77.041 158.464,77.136 158.676,76.924
  region net U1_6: 165.103,77.078 164.937,76.652 164.762,76.79 164.881,77.095
  pour cut-out net S$57029: 113.364,110.541 cw(c115.914,110.549) 118.464,110.541 cw(c115.914,110.533) 113.364,110.541
  pour cut-out net S$56996: 173.763,110.19 cw(c176.313,110.198) 178.863,110.19 cw(c176.313,110.182) 173.763,110.19
  pour cut-out net S$56985: 187.491,60.888 cw(c190.056,60.888) 192.621,60.888 cw(c190.056,60.888) 187.491,60.888
  pour cut-out net S$56888: 170.685,59.916 cw(c173.235,59.924) 175.785,59.916 cw(c173.235,59.908) 170.685,59.916
  pour cut-out net S$56875: 130.158,57.459 cw(c132.708,57.467) 135.258,57.459 cw(c132.708,57.451) 130.158,57.459
  pour cut-out net S$56864: 60.849,57.243 cw(c63.399,57.251) 65.949,57.243 cw(c63.399,57.235) 60.849,57.243
  pour cut-out net S$56853: 55.881,95.205 cw(c58.431,95.213) 60.981,95.205 cw(c58.431,95.197) 55.881,95.205
  pour cut-out net S$56840: 77.076,110.865 cw(c79.626,110.873) 82.176,110.865 cw(c79.626,110.857) 77.076,110.865
  region net IU1_3: 128.686,90.036 127.694,90.51 127.402,89.486 128.072,89.165
  region net U1_7: 180.517,71.668 180.194,71.345 180.063,71.516 180.346,71.799
  pour cut-out: 146.829,64.695 167.376,64.695 167.376,62.157 146.829,62.157

## Silkscreen, mask and mechanical layers (free items; w line width, h text height)
Top Overlay:
  drawing of 814 lines, arcs and shapes, not listed
  text "A" at 94.409,103.093 h2.03 r201
  text "." at 87.715,80.992 h2.03 r135
  text "." at 88.93,80.587 h2.03 r135
  text "-" at 84.936,71.364 h2.03 r180
  text "数字" at 62.58,70.851 h2.03
  text "模拟" at 62.235,65.146 h2.03
  text "+" at 83.603,63.773 h2.03 r223
  text "B" at 87.159,60.743 h2.03 r180
  text "SWC SWD RST 3V3 GND" at 68.07,56.681 h0.8
Bottom Overlay:
  text "→" at 181.564,112.539 h5 r18
  text "QR码贴放区" at 189.502,109.866 h2 r358
  text "SWC SWD RST 3V3 GND" at 67.908,58.264 h0.8 r180
  text "V2.9" at 185.52,55.282 h2.03